# Altium PCB Beacon_V2.PcbDoc
Units mm, origin at the board's own origin, x right, y up, seen from the top; angles counter-clockwise.
Board outline 96.11 x 75.68 mm, 2 copper layers (Top Layer, Bottom Layer); 59 components, 45 nets, 261 pads, 47 vias.
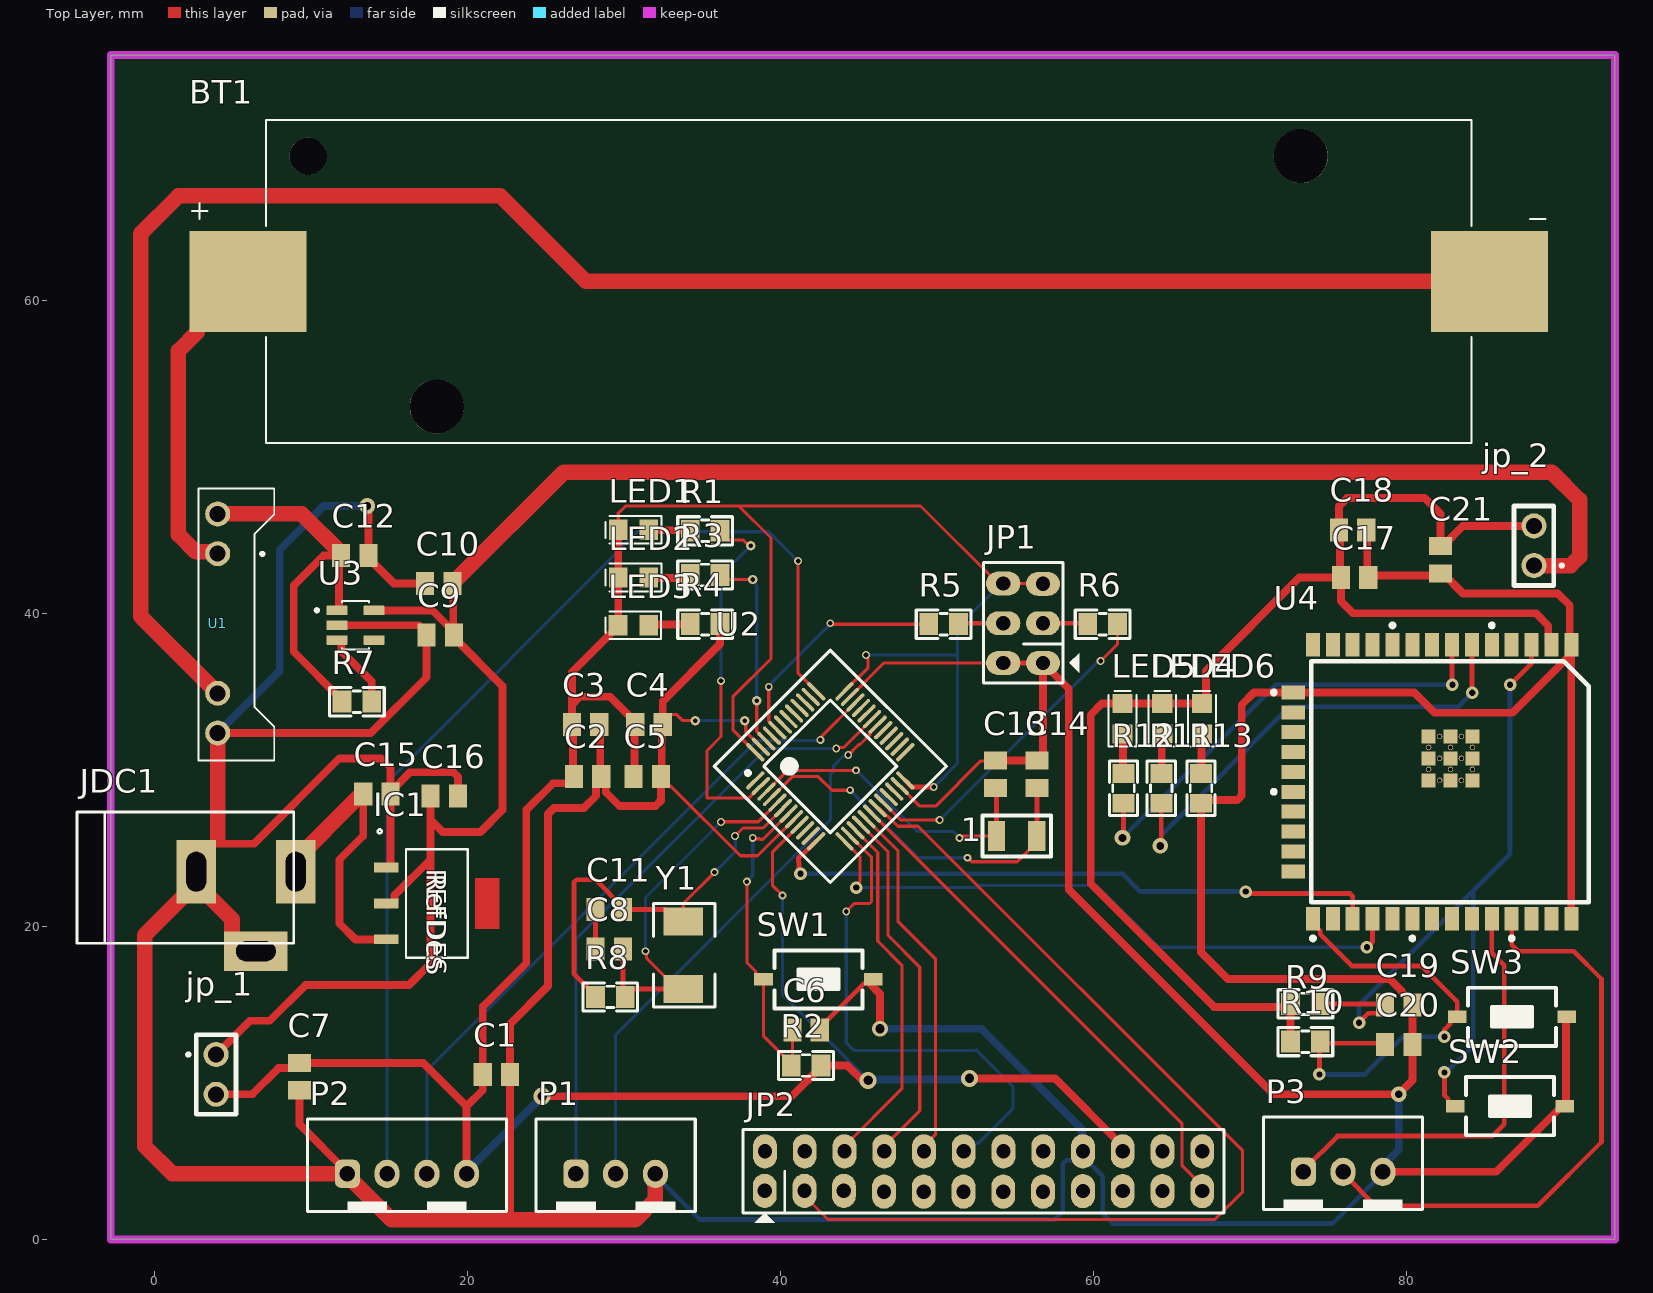
[diagram p0: Top Layer view]
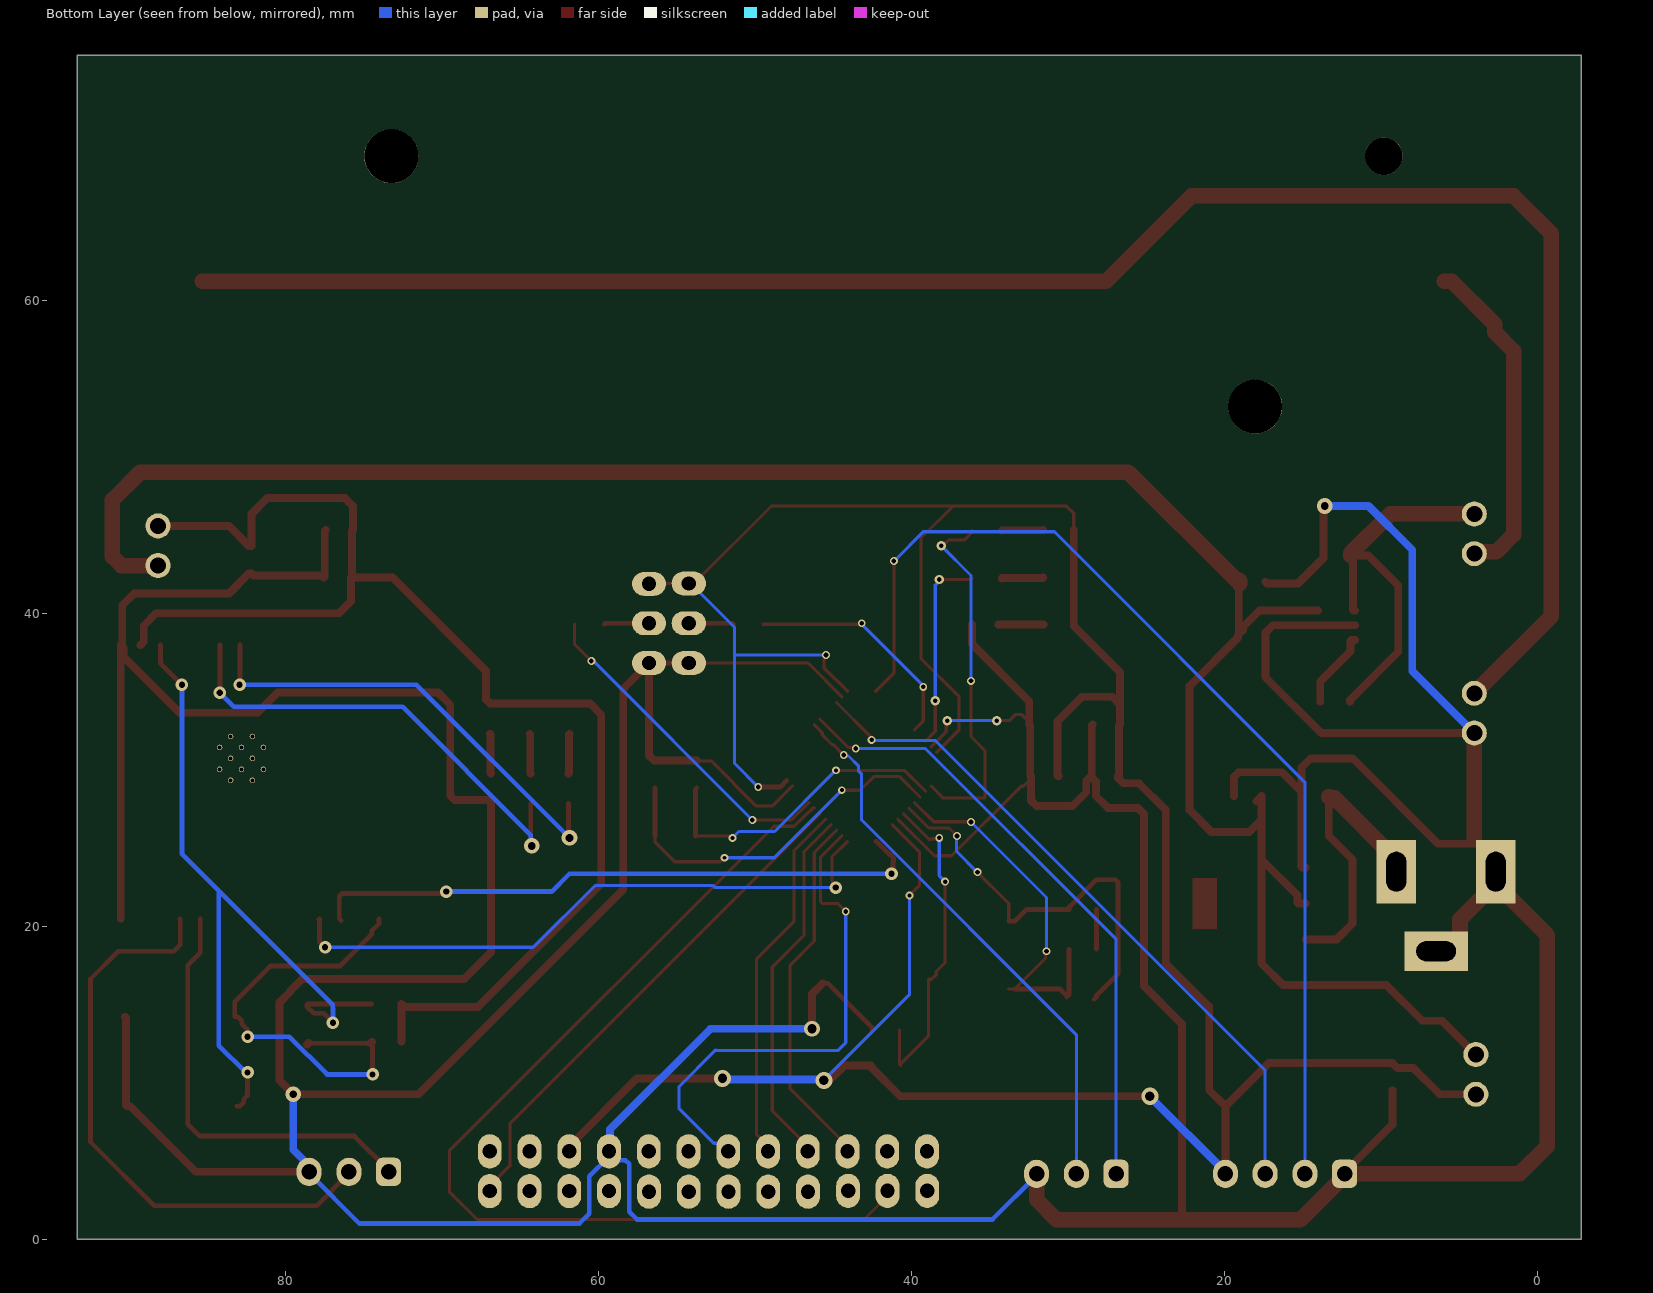
[diagram p1: Bottom Layer view, seen from below]

## Layer stack, top to bottom
Top Solder: solder mask 0.0102, Solder Resist, Dk 3.5
Top Layer: signal copper 0.0356
Dielectric 1: dielectric 0.32, FR-4, Dk 4.8
Bottom Layer: signal copper 0.0356
Bottom Solder: solder mask 0.0102, Solder Resist, Dk 3.5

## Board outline
-2.794,0 -2.794,75.677 93.317,75.677 93.317,0

## Design rules (kind name [scope] priority, off if disabled: settings)
Clearance [All] p1: gap=0.2 ignorepadtopadclearanceinfootprint=FALSE
PolygonConnect [All] p1: connectstyle=Relief reliefconductorwidth=0.254 reliefentries=4 polygonreliefangle="90 Angle" airgapwidth=0.254
RoutingVias [All] p1: holewidth=0.711 width=1.27 viastyle="Through Hole" minholewidth=0.711 minwidth=1.27 maxholewidth=0.711 maxwidth=1.27
SolderMaskExpansion [All] p1: expansion=0.102 istentingtop=FALSE
Width POWER [InNetClass('POWER')] p1: maxlimit=1 minlimit=0.2 preferedwidth=0.5 minimp=50.000000 maximp=50.000000 favimp=50.000000
Width RON [InNetClass('POWER')] p2: maxlimit=0.5 minlimit=0.2 preferedwidth=0.3
30 further rules are at their usual default settings.

## Classes and differential pairs
net class RON: BOOT0 BOOT1 BOOT_ESP DB_RX DB_TX DC_IN DW_IRQ DW_NSS DW_RESET EN_ESP LED_ESP_34 LED_ESP_35 MISO MOSI NetC8_1 NetJP1_2 NetJP1_5 NetLED1_2 NetLED2_2 NetLED3_2 NetLED4_2 NetLED5_2 NetLED6_2 NetR7_2 OSCIN OSCOUT PB9 PC13 PC14 PC15 RESET RX0_ESP SCK STMRX_ESPTX STMTX-ESPRX SWCLK SWIO TX0_ESP
net class POWER: 3V3 3V3_ESP GND O_3V3 VBAT+ VBAT- VOUT
component class Beacon_V2: 1 BT1 C1 C2 C3 C4 C5 C6 C7 C8 C9 C10 C11 C12 C13 C14 C15 C16 C17 C18 C19 C20 C21 IC1 JDC1 JP1 jp_1 jp_2 LED2 LED5 LED6 P1 P2 P3 R2 R7 R9 R12 R13 SW1 SW2 SW3 U1 U2 U3 U4 Y1

## Components (designator, comment, footprint, x,y, rotation, side; value= is the part's Value field where it differs from the comment)
1 "ABS07" ABS07 55.085,25.781 r180 top
BT1 "1042P" BAT_1042P 45.634,61.213 r180 top
C1 "10uF" Capacitor_0805 21.844,10.541 r0 top
C2 "0.1uF" Capacitor_0805 27.672,29.591 r0 top
C3 "0.1uF" Capacitor_0805 27.545,32.893 r0 top
C4 "0.1uF" Capacitor_0805 31.595,32.893 r0 top
C5 "0.1uF" Capacitor_0805 31.482,29.591 r0 top
C6 "0.1uF" Capacitor_0805 41.628,13.376 r0 top
C7 "0.1uF" Capacitor_0805 9.271,10.4 r270 top
C8 "20pF" Capacitor_0805 29.055,18.542 r0 top
C9 "47uF" Capacitor_0805 18.26,38.608 r180 top
C10 "0.1uF" Capacitor_0805 18.161,41.91 r180 top
C11 "20pF" Capacitor_0805 29.055,21.082 r0 top
C12 "0.1uF" Capacitor_0805 12.799,43.688 r0 top
C13 "20pF" Capacitor_0805 53.721,29.718 r270 top
C14 "20pF" Capacitor_0805 56.388,29.718 r270 top
C15 "10uF" Capacitor_0805 14.21,28.448 r0 top
C16 "10uF" Capacitor_0805 18.514,28.321 r0 top
C17 "0.1uF" Capacitor_0805 76.68,42.291 r0 top
C18 "10uF" Capacitor_0805 76.553,45.339 r0 top
C19 "10uF" Capacitor_0805 79.502,14.986 r0 top
C20 "10uF" Capacitor_0805 79.502,12.446 r0 top
C21 "0.1uF" Capacitor_0805 82.169,43.434 r270 top
IC1 "NCP1117ST33T3G" SOT223-3_ONS 18.034,21.463 r270 top
JDC1 "Jac DC" DC-IN 5.842,20.955 r0 top
JP1 "Connector 3x2" JP3x2 55.499,39.37 r90 top
JP2 "Connector 12x2" JP12X2_1 39.002,3.086 r0 top
jp_1 "SW_POWER" JP_1x2 3.937,10.541 r270 top
jp_2 "SW_ESP" JP_1x2 88.138,44.323 r90 top
LED1 "Led" "Led 0805 Blue" 30.607,45.339 r0 top
LED2 "Led" "Led 0805 Blue" 30.607,42.291 r0 top
LED3 "Led" "Led 0805 Blue" 30.597,39.243 r0 top
LED4 "Led" "Led 0805 Blue" 64.389,33.274 r270 top
LED5 "Led" "Led 0805 Blue" 61.849,33.274 r270 top
LED6 "Led" "Led 0805 Blue" 66.929,33.274 r270 top
P1 "UART" HDR/Header/3/BOX 29.464,4.191 r90 top
P2 "SWD" HDR/Header/4/BOX 16.129,4.191 r0 top
P3 "UART" HDR/Header/3/BOX 75.946,4.318 r90 top
R1 "1k" "tro smd 0805" 35.179,45.339 r0 top
R2 "10k" "tro smd 0805" 41.628,11.176 r0 top
R3 "1k" "tro smd 0805" 35.179,42.512 r0 top
R4 "1k" "tro smd 0805" 35.179,39.37 r0 top
R5 "10k" "tro smd 0805" 50.419,39.37 r0 top
R6 "10k" "tro smd 0805" 60.579,39.37 r0 top
R7 "1k" "tro smd 0805" 12.926,34.417 r0 top
R8 "1M" "tro smd 0805" 29.117,15.555 r0 top
R9 "10k" "tro smd 0805" 73.533,14.986 r180 top
R10 "10k" "tro smd 0805" 73.533,12.573 r180 top
R11 "1k" "tro smd 0805" 64.389,28.829 r270 top
R12 "1k" "tro smd 0805" 61.976,28.829 r270 top
R13 "1k" "tro smd 0805" 66.929,28.829 r270 top
SW1 "SW" SW1-SMD 42.418,16.62 r180 top value="SW chip 2 pin"
SW2 "SW" SW1-SMD 86.614,8.509 r180 top value="SW chip 2 pin"
SW3 "SW" SW1-SMD 86.741,14.224 r180 top value="SW chip 2 pin"
U1 "TP4056_charger" TP4056_charger -7.464,39.355 r0 top
U2 "STM32F103C8T6" LQFP48 43.18,30.226 r315 top
U3 "AP2112K-3.3TRG1" SOT95P285X140-5N 12.841,39.243 r0 top
U4 "ESP32_WROOM_32U" ESP32_WROOM_32U 81.647,29.234 r270 top
Y1 "8Mhz" "Thach Anh 2 chan SMD5032" 33.782,18.161 r270 top value=4Mhz

## Footprints (in the part's own frame and the unit in brackets; to place one, negate y for a bottom-side part, rotate by r counter-clockwise, add the part's x,y. Pads: shape width x height; smd on the part's side, far side on the other; paste and mask are expansions set on the pad)
ABS07 [mm] "HC-49US XTAL"
  rect 1.1x1.9 smd: 1(-1.29,0) 2(1.29,0)
  silkscreen extent -2.19,-1.3 2.18,1.31, body extent -1.6,-0.75 1.6,0.75, height 0.9
BAT_1042P [mm]
  rect 7.46x6.47 smd: N(-39.67,0) P(39.67,0)
  round 3.45 hole 3.45 unplated: ""(-27.6,-8) ""(27.6,8)
  round 2.39 hole 2.39 unplated: ""(35.82,-8)
  silkscreen extent -43.25,-10.32 43.25,10.32, body extent -43,-9.94 43,10.71, height 14.86
Capacitor_0805 [mm]
  rect 1.16x1.47 smd: 1(-0.875,0) 2(0.875,0)
  body extent -1,-0.6 1,0.6, height 1.2
DC-IN [mil] "Jac DC input"
  rect 100x160 hole 50 slot 100 at 90 deg: 1(125,100) 2(-125,100)
  rect 160x100 hole 50 slot 100 at 0 deg: 3(25,-100)
  silkscreen extent -425,-80 120,250, body extent -410,-105 134,269, height 434
ESP32_WROOM_32U [mm]
  rect 1.5x0.9 smd: 1(-8.75,8.88) 2(-8.75,7.61) 3(-8.75,6.34) 4(-8.75,5.07) 5(-8.75,3.8) 6(-8.75,2.53) 7(-8.75,1.26) 8(-8.75,-0.01) 9(-8.75,-1.28) 10(-8.75,-2.55) 11(-8.75,-3.82) 12(-8.75,-5.09) 13(-8.75,-6.36) 14(-8.75,-7.63) 25(8.75,-7.63) 26(8.75,-6.36) 27(8.75,-5.09) 28(8.75,-3.82) 29(8.75,-2.55) 30(8.75,-1.28) 31(8.75,-0.01) 32(8.75,1.26) 33(8.75,2.53) 34(8.75,3.8) 35(8.75,5.07) 36(8.75,6.34) 37(8.75,7.61) 38(8.75,8.88)
  rect 0.9x1.5 smd: 15(-5.715,-8.88) 16(-4.445,-8.88) 17(-3.175,-8.88) 18(-1.905,-8.88) 19(-0.635,-8.88) 20(0.635,-8.88) 21(1.905,-8.88) 22(3.175,-8.88) 23(4.445,-8.88) 24(5.715,-8.88)
  rect 0.9x0.9 smd: 39_1(-2.9,2.56) 39_2(-1.5,2.56) 39_3(-0.1,2.56) 39_4(-2.9,1.16) 39_5(-1.5,1.16) 39_6(-0.1,1.16) 39_7(-2.9,-0.24) 39_8(-1.5,-0.24) 39_9(-0.1,-0.24)
  round 0.35 hole 0.25 mask+0: 40_1(-2.2,2.56) 40_2(-0.8,2.56) 40_3(-2.9,1.86) 40_4(-1.5,1.86) 40_5(-0.1,1.86) 40_6(-2.2,1.16) 40_7(-0.8,1.16) 40_8(-2.9,0.46) 40_9(-1.5,0.46) 40_10(-0.1,0.46) 40_11(-2.2,-0.24) 40_12(-0.8,-0.24)
  silkscreen extent -10.1,-10.23 10.1,10, body extent -9,-9.13 9,10.07, height 3.35
HDR/Header/3/BOX [mm]
  rrect50% 1.8x1.6 hole 1: 1(0,2.54)
  oval 1.8x1.6 hole 1: 2(0,0) 3(0,-2.54)
  silkscreen extent -2.41,-5.08 3.5,5.08, body extent -2.29,-5 3.41,5, height 7
HDR/Header/4/BOX [mm]
  rrect50% 1.6x1.8 hole 1: 1(-3.81,0)
  oval 1.6x1.8 hole 1: 2(-1.27,0) 3(1.27,0) 4(3.81,0)
  silkscreen extent -6.35,-2.41 6.35,3.5, body extent -6.25,-2.3 6.25,3.4, height 7
JP3x2 [mil] "Connector 3x2"
  oval 60x86 hole 36: 1(-100,-50) 2(0,-50) 3(99,-50) 4(-100,50) 5(0,50) 6(100,50)
  silkscreen extent -150,-141 153,100, body extent -150,-100 150,100, height 335
JP12X2_1 [mil]
  oval 60x86 hole 36: 1(-0.5,0.5) 2(99.5,0.5) 3(198.5,0.5) 4(299.5,-1.5) 5(399.5,-1.5) 6(499.5,-1.5) 7(599.5,-1.5) 8(699.5,-1.5) 9(800,0) 10(900,0) 11(1000,0) 12(1100,0) 13(0,100) 14(100,100) 15(200,100) 16(300,100) 17(400,100) 18(500,100) 19(600,100) 20(700,100) 21(800,100) 22(900,100) 23(1000,100) 24(1100,100)
  silkscreen extent -55,-80 1155,155, body extent -55,-47 1155,150, height 366
JP_1x2 [mm] "CWF2 (DS1069-1x2)"
  round 1.6 hole 1.02 mask+0.1: 1(-1.27,0) 2(1.27,0)
  silkscreen extent -2.54,-1.88 2.54,1.27, body extent -3.77,-2.2 3.73,3.55, height 7
"Led 0805 Blue" [mm]
  rect 1.2x1.3 smd: 1(-0.975,0) 2(0.975,0)
  silkscreen extent -1.78,-0.89 1.78,0.89, body extent -1.01,-0.62 1.01,0.63, height 1.1
LQFP48 [mm]
  oval 0.25x1.55 smd: 1(-2.75,-4.025) 2(-2.25,-4.025) 3(-1.75,-4.025) 4(-1.25,-4.025) 5(-0.75,-4.025) 6(-0.25,-4.025) 7(0.25,-4.025) 8(0.75,-4.025) 9(1.25,-4.025) 10(1.75,-4.025) 11(2.25,-4.025) 12(2.75,-4.025) 25(2.75,4.025) 26(2.25,4.025) 27(1.75,4.025) 28(1.25,4.025) 29(0.75,4.025) 30(0.25,4.025) 31(-0.25,4.025) 32(-0.75,4.025) 33(-1.25,4.025) 34(-1.75,4.025) 35(-2.25,4.025) 36(-2.75,4.025)
  oval 1.55x0.25 smd: 13(4.025,-2.75) 14(4.025,-2.25) 15(4.025,-1.75) 16(4.025,-1.25) 17(4.025,-0.75) 18(4.025,-0.25) 19(4.025,0.25) 20(4.025,0.75) 21(4.025,1.25) 22(4.025,1.75) 23(4.025,2.25) 24(4.025,2.75) 37(-4.025,2.75) 38(-4.025,2.25) 39(-4.025,1.75) 40(-4.025,1.25) 41(-4.025,0.75) 42(-4.025,0.25) 43(-4.025,-0.25) 44(-4.025,-0.75) 45(-4.025,-1.25) 46(-4.025,-1.75) 47(-4.025,-2.25) 48(-4.025,-2.75)
  silkscreen extent -5.25,-5.25 5.25,5.25, body extent -4.5,-4.5 4.5,4.5, height 1.5
SOT95P285X140-5N [mm]
  rrect15% 1.35x0.6 smd: 1(-1.185,0.95) 2(-1.185,0) 3(-1.185,-0.95) 4(1.185,-0.95) 5(1.185,0.95)
  silkscreen extent -2.57,-1.55 0.85,1.55, body extent -1.5,-1.4 1.5,1.4, height 1.4
SOT223-3_ONS [mil]
  rect 24x61 smd paste+0 mask+0: 1(-90.5,-127) 2(0,-127) 3(90.5,-127)
  Top Layer region: 64,96.5 64,157.5 -64,157.5 -64,96.5
  silkscreen extent -186,-148 137,78, body extent -131,-144 131,144, height 68
SW1-SMD [mm]
  rect 1.2x0.8 smd: 1(-3.5,0) 2(3.5,0)
  silkscreen extent -2.82,-1.85 2.82,1.85, body extent -3.05,-1.85 3.05,1.85, height 2.5
"Thach Anh 2 chan SMD5032" [mil]
  rect 70x100 smd: 1(-85,0) 2(85,0)
  silkscreen extent -130,-75 130,80, body extent -98,-63 98,63, height 51
TP4056_charger [mm]
  round 1.6 hole 1.02 mask+0.1: 1(11.5,4.46) 2(11.5,-4.46) 3(11.5,7) 4(11.5,-7)
  silkscreen extent 10.29,-8.76 15.11,8.64, body extent -14.19,-8.76 15.11,8.64, height 9.34
"tro smd 0805" [mm]
  rect 1.2x1.4 smd: 1(-0.946,-0.061) 2(0.954,-0.061)
  silkscreen extent -1.75,-0.97 1.75,0.84, body extent -1.56,-0.76 1.44,0.64, height 0.53

## Part data
1: "SMD Quartz Crystal", Created by="Zion Blue", Published="28 April 2014", Publisher="Cynetik Group"
BT1: "SMT Polarized Battery Holder for 18650 Battery", Package=None, Check_prices=https://www.snapeda.com/parts/1042P/Keystone/view-part/?ref=eda, MF="Keystone Electronics", MP=1042P, SnapEDA_Link=https://www.snapeda.com/parts/1042P/Keystone/view-part/?ref=snap
C1 C2 C3 C4 C5 C6 C7 C8 C9 C10 C11 C12 C13 C14 C15 C16 C17 C18 C19 C20 C21: library part Capacitor_0805, "Capacitor; Ceramic; Cap; .220uF; Tol 10%; SMT; Vol-Rtg 50V; X7R; Tape And Reel"
IC1: "SOT223"
JDC1: library part DCIN, "Jac DC input"
JP1: library part JP3x2
JP2: library part JP12x2
jp_1 jp_2: library part JP_1x2
LED1 LED2 LED3 LED4 LED5 LED6: "Typical LED"
P1 P3: library part "Header 3", "Header, 3-Pin"
P2: library part "Header 4_1", "Header, 4-Pin"
R1 R3 R4 R7 R11 R12 R13: library part "Tro 0805 1% 1k", "Dán", Chung_Loai=Dán, Don_Vi=Con, Ma_Hang=MH005468, So_Chan=2, Ten_Linh_Kien="Trở 0805 1% 1k"
R2 R5 R6 R9 R10: library part "Tro 0805 1% 10k", "Dán", Chung_Loai=Dán, Don_Vi=Con, Ma_Hang=MH005473, So_Chan=2, Ten_Linh_Kien="Trở 0805 1% 10k"
R8: library part "Tro 0805 1% 1M", "Dán", Chung_Loai=Dán, Don_Vi=Con, Ma_Hang=MH005469, So_Chan=2, Ten_Linh_Kien="Trở 0805 1% 1M"
SW1 SW2 SW3: library part SW2, "Switch button 2 pin"
U2: "STM32 ARM-based 32-bit MCU with ARM 32-bit Cortex-M3 Microcontroller, 128 Kbytes Flash, 48-pin LQFP, Industrial Temperature", ComponentLink1Description="Manufacturer Link", ComponentLink1URL=www.st.com/stm32, ComponentLink2Description=Datasheet, ComponentLink2URL=http://www.st.com/stonline/products/literature/ds/13586.pdf, DatasheetVersion="rev6, Mar-2008", PackageDescription="48-Pin Low-Profile Quad Flat Pack, 7 x 7 mm Body, 0.5 mm Pitch (LQFP48)", PackageReference=LQFP48, PackageVersion=Mar-2008, Published=30-May-2008, Publisher="Altium Limited"
U3: "Linear Voltage Regulator IC Positive Fixed 1 Output 600mA SOT-25", Package="SOT-753 Diodes Inc.", Availability="In Stock", Check_prices=https://www.snapeda.com/parts/AP2112K-3.3TRG1/Diodes+Inc./view-part/?ref=eda, MF="Diodes Inc.", MP=AP2112K-3.3TRG1, Price=None, Purchase-URL=https://pricing.snapeda.com/search/part/AP2112K-3.3TRG1/?ref=eda, SnapEDA_Link=https://www.snapeda.com/parts/AP2112K-3.3TRG1/Diodes+Inc./view-part/?ref=snap
U4: "Bluetooth, WiFi 802.11b/g/n, Bluetooth v4.2 +EDR, Class 1, 2 and 3 Transceiver Module 2.4GHz ~ 2.5GHz Antenna Not Included, U.FL Surface Mount"
Y1: library part "Thach Anh 2 chan SMD 5032", "Crystal For all Crystal 2pin."

## Via types
v1: diameter 0.5, hole 0.3, Top Layer to Bottom Layer, 18 vias
v2: diameter 0.8, hole 0.4, Top Layer to Bottom Layer, 11 vias
v3: diameter 0.5, hole 0.25, Top Layer to Bottom Layer, 5 vias
v4: diameter 0.6, hole 0.3, Top Layer to Bottom Layer, 5 vias
v5: diameter 1, hole 0.5, Top Layer to Bottom Layer, 4 vias
v6: diameter 1.1, hole 0.6, Top Layer to Bottom Layer, 3 vias
v7: diameter 1, hole 0.6, Top Layer to Bottom Layer, 1 vias

## Nets (pads, with @x,y where several pads share a name; then routed paths per layer and width w, separated by ;. In a path a pad name is that pad's centre, name@x,y a point inside that pad or via, vN(x,y) a via of type N, cw(c..) or ccw(c..) an arc to the next point about the centre after c; other vN are vias at no path point)
3V3: C1.1 C2.1 C3.1 C4.1 C5.1 C7.1 JP1.3 JP1.6 JP2.22 jp_1.2 LED1.1 LED2.1 LED3.1 P2.4 R2.2 U2.9 U2.24 U2.36 U2.48 | length 213.3
  Top Layer w0.2: LED1.1 29.632,46.396 30.099,46.863 37.338,46.863 ; U2.48 36.957,32.56 36.957,34.671 39.386,37.1 39.386,44.815 37.338,46.863 ; v3(40.132,21.971) 39.497,22.606 39.497,24.775 U2.9 ; U2.36 45.593,36.528 v1@45.593,37.169 ; JP1.3 56.756,41.897 54.242,41.897 JP1.6 53.899,41.91 48.946,46.863 37.338,46.863
  Top Layer w0.3: U2.24 48.395,28.9 v1(49.784,28.9)
  Top Layer w0.5: jp_1.2 6.249,9.271 7.923,10.945 8.941,10.945 C7.1 17.173,11.275 19.939,8.509 ; P2.4 19.939,8.509 ; v6(24.765,9.144) 40.711,9.144 42.582,11.015 R2.2 44.257,11.115 v6@45.339,10.033 ; LED1.1 LED2.1 29.627,42.286 29.627,39.248 LED3.1 29.622,39.193 26.67,36.241 26.67,34.163 ; C5.1 30.663,29.647 30.663,33.104 29.097,34.671 27.178,34.671 26.67,34.163 ; v6(52.07,10.287) 57.531,10.287 61.862,5.956 JP2.22 ; 19.939,8.509 20.969,9.539 C1.1 20.969,14.873 23.749,17.653 23.749,27.432 25.467,29.15 26.467,29.15 26.797,29.48 C2.1 26.734,29.654 26.734,32.829 C3.1 26.67,34.163
  Bottom Layer w0.2: v3(40.132,21.971) 40.132,15.621 v6(45.593,10.16) ; v1(45.466,37.338) 51.308,37.338 ; v1(49.784,28.9) 51.308,30.424 51.308,37.338 ; JP1.6 54.102,41.91 51.308,39.116 51.308,37.338
  Bottom Layer w0.5: P2.4 19.939,4.305 24.765,9.131 v6(24.765,9.144) ; v6(45.593,10.16) 45.657,10.223 52.007,10.223 v6(52.07,10.287)
3V3_ESP: C17.1 C18.1 C21.1 jp_2.2 LED4.1 LED5.1 LED6.1 R9.2 R10.2 U4.2 | length 87
  Top Layer w0.5: R10.2 R9.2 72.391,14.859 67.691,14.859 59.817,22.733 59.817,33.528 60.538,34.249 LED5.1 LED4.1 LED6.1 67.183,34.503 67.183,36.322 73.152,42.291 C17.1 75.805,40.781 76.581,40.005 88.265,40.005 89.057,39.213 89.057,38.184 U4.2 ; C17.1@75.741,42.355 75.741,45.276 C18.1 75.678,46.849 76.2,47.371 81.153,47.371 82.169,46.355 C21.1 82.324,44.309 83.608,45.593 jp_2.2 jp_2.2@88.082,45.649
BOOT0: R5.1 U2.44 | length 15
  Top Layer w0.2: v1(39.243,35.306) 39.243,33.116 39.804,32.555 U2.44 ; v1(43.18,39.37) 43.241,39.309 R5.1
  Bottom Layer w0.2: v1(39.243,35.306) 39.243,35.369 43.18,39.306 v1(43.18,39.37)
BOOT1: R6.2 U2.20 | length 21.4
  Top Layer w0.2: U2.20 47.67,26.797 v1(50.165,26.797) ; v1(60.452,36.957) 61.533,38.038 R6.2
  Bottom Layer w0.2: v1(50.165,26.797) 60.268,36.9 60.395,36.9 v1(60.452,36.957)
BOOT_ESP: C20.1 R10.1 SW3.2 U4.25 | length 29.7
  Top Layer w0.3: U4.25 74.017,20.184 74.487,19.714 74.487,19.493 76.517,17.462 80.962,17.462 83.241,15.184 SW3.2 83.041,14.224 82.791,13.974 82.791,13.774 82.423,13.406 v2(82.423,12.954) ; v2(74.434,10.541) 74.434,12.589 R10.1 ; R10.1@74.572,12.54 C20.1@78.533,12.54
  Top Layer w0.5: R10.1 R10.1@74.572,12.54 ; C20.1@78.533,12.54 C20.1
  Bottom Layer w0.3: v2(74.434,10.541) 77.343,10.541 79.756,12.954 v2(82.423,12.954)
DB_RX: P1.1 U2.31 | length 39.7
  Top Layer w0.2: v1(43.561,31.369) 43.618,31.426 44.027,31.426 U2.31
  Bottom Layer w0.2: P1.1 26.924,19.177 39.116,31.369 v1(43.561,31.369)
DB_TX: P1.2 U2.30 | length 35.8
  Top Layer w0.2: v1(44.323,30.945) 44.996,31.618 45.08,31.618 45.696,32.234 45.696,32.375 46.203,32.882 U2.30
  Bottom Layer w0.2: P1.2 29.464,13.081 43.18,26.797 43.18,29.718 43.373,29.911 43.373,30.238 44.022,30.888 44.266,30.888 v1(44.323,30.945)
DC_IN: C15.1 IC1.3 JDC1.1 | length 19.1
  Top Layer w0.5: C15.1 13.335,28.293 13.335,25.781 11.811,24.257 11.811,20.193 12.84,19.164 IC1.3
  Top Layer w1: JDC1.1 9.017,24.257 12.973,28.213 13.255,28.213 C15.1@13.335,28.293
DW_IRQ: JP2.2 U2.19 | length 64.7
  Top Layer w0.2: JP2.2 41.529,2.769 43.028,1.27 67.748,1.27 69.524,3.047 69.524,5.66 48.787,26.397 47.504,26.397 46.84,27.026 46.309,27.557 U2.19
DW_NSS: JP2.18 U2.14 | length 32.6
  Top Layer w0.2: v1(44.196,20.955) 44.704,21.463 45.692,21.463 45.809,21.58 45.809,24.415 U2.14
  Bottom Layer w0.2: v1(44.196,20.955) 44.196,12.573 44.704,12.065 52.451,12.065 52.495,12.109 54.864,9.74 54.864,8.382 52.621,6.139 52.215,6.139 JP2.18
DW_RESET: JP2.12 U2.18 | length 32.9
  Top Layer w0.2: U2.18 65.659,7.393 65.659,4.699 66.942,3.416 JP2.12
EN_ESP: C19.1 R9.1 SW2.2 U4.3 | length 50.1
  Top Layer w0.3: R9.1 78.566,15.047 C19.1 78.627,14.874 78.197,14.444 77.563,14.444 v2(76.962,13.843) ; v2(82.423,10.668) 82.423,9.2 82.664,8.959 82.664,8.759 82.914,8.509 SW2.2 ; v2(86.614,35.433) 87.987,36.806 U4.3
  Bottom Layer w0.3: v2(76.962,13.843) 76.962,14.777 76.982,14.757 76.982,15.006 84.264,22.288 ; v2(82.423,10.668) 82.55,10.668 84.264,12.383 84.264,22.288 ; v2(86.614,35.433) 86.614,24.638 84.264,22.288
GND: C1.2 C2.2 C3.2 C4.2 C5.2 C6.2 C7.2 C9.2 C10.2 C12.2 C13.1 C14.1 C15.2 C16.2 C17.2 C18.2 C19.2 C20.2 C21.2 IC1.1 JDC1.2 JDC1.3 JP1.1 JP1.4 JP2.21 P1.3 P2.1 P3.3 R4.2 R13.2 SW1.1 SW2.1 SW3.1 U1.4 U2.8 U2.23 U2.35 U2.47 U3.2 U4.1 U4.15 U4.38 | length 505.7
  Top Layer w0.2: C5.2 32.357,29.436 32.837,28.956 32.992,28.956 37.437,24.511 38.526,24.511 U2.8 ; C4.2@32.47,33.048 32.95,33.528 33.373,33.528 33.754,33.147 v4@34.417,33.147 ; v4(37.719,33.147) 37.777,33.089 37.777,32.447 U2.47 ; U2.35 44.442,34.663 44.45,34.671 44.45,34.678 46.602,36.83 JP1.4 ; U2.23 48.902,27.686 49.911,27.686 52.803,30.578 53.706,30.578 C13.1
  Top Layer w0.3: C6.2 42.503,13.531 45.341,16.37 SW1.1@45.668,16.37 ; JP1.4 JP1.1
  Top Layer w0.5: JDC1.2 2.667,24.257 3.687,25.277 6.354,25.277 11.811,30.734 14.478,30.734 15.085,30.127 C15.2@15.085,28.603 ; U1.4 13.816,32.355 17.385,35.924 C9.2 17.378,38.615 17.378,38.77 16.905,39.243 U3.2 ; C7.2 9.271,7.339 12.319,4.291 P2.1 ; v5(13.589,46.863) 13.674,46.778 C12.2 13.674,43.533 15.297,41.91 C10.2 C10.2@17.399,42.023 ; IC1.1 15.03,23.762 15.085,23.817 C15.2 C15.2@15.085,28.603 ; C16.2 19.389,29.552 19.096,29.845 16.327,29.845 C15.2@15.085,28.603 ; 22.733,1.26 22.719,1.274 C1.2 22.719,13.761 25.146,16.188 25.146,27.178 25.527,27.559 27.432,27.559 28.217,28.344 28.217,29.261 C2.2 ; C3.2 28.483,32.829 28.483,29.654 C2.2 ; C5.2@32.357,29.436 32.357,28.039 32.004,27.686 29.718,27.686 28.829,28.575 28.829,29.309 C2.2 ; C5.2 32.413,29.647 32.413,32.837 C4.2 32.47,33.048 32.47,34.375 36.133,38.038 R4.2 ; SW1.1@45.668,16.37 46.355,15.683 v7(46.355,13.462) ; C13.1 C14.1 56.439,30.593 56.769,30.923 JP1.1 56.822,36.83 57.295,36.357 57.295,36.304 58.42,35.179 58.42,22.352 71.501,9.271 v5(79.502,9.271) 79.502,9.289 80.377,10.164 C20.2 C19.2 80.377,15.141 79.693,15.825 79.693,15.871 78.927,16.637 68.58,16.637 66.868,18.349 R13.2 67.061,28.067 69.176,28.067 69.469,28.36 69.469,34.163 70.255,34.949 U4.15 80.494,34.949 81.788,33.655 86.764,33.655 90.327,37.218 90.327,37.784 U4.1 ; C18.2 77.491,45.276 77.491,42.355 C17.2 77.689,42.425 82.035,42.425 C21.2 82.324,42.559 83.608,41.275 89.662,41.275 90.424,40.513 90.424,38.087 U4.1 ; P3.3 85.723,4.318 89.914,8.509 SW2.1 90.178,8.572 90.178,14.16 SW3.1 ; U4.38 U4.1
  Top Layer w1: JDC1.2 JDC1.2@2.667,22.733 ; 4.036,25.626 U1.4 ; JDC1.3 5.715,18.415 4.945,19.185 4.945,20.455 JDC1.2@2.667,22.733 ; P1.3 32.004,2.54 30.724,1.26 22.733,1.26 15.15,1.26 12.319,4.091 P2.1 1.143,4.191 -0.635,5.969 -0.635,19.431 JDC1.2@2.667,22.733
  Bottom Layer w0.2: v4(34.544,33.147) v4(37.719,33.147)
  Bottom Layer w0.3: P1.3 32.004,4.091 34.825,1.27 57.531,1.27 58.039,1.778 58.039,4.826 58.275,5.062 58.757,5.062 JP2.21 59.322,5.296 60.579,4.039 60.579,1.651 61.214,1.016 75.284,1.016 78.486,4.218 P3.3
  Bottom Layer w0.5: U1.4 8.001,36.32 8.001,44.069 10.795,46.863 v5(13.589,46.863) ; v7(46.355,13.462) 52.832,13.462 59.261,7.033 59.261,5.687 JP2.21 ; P3.3 78.486,4.716 79.502,5.732 v5(79.502,9.271)
LED_ESP_34: R11.2 U4.6 | length 29.7
  Top Layer w0.3: R11.2 64.328,25.461 v5@64.389,25.4 ; U4.6 84.177,35.203 v2@84.201,35.179
  Bottom Layer w0.3: v5(64.262,25.146) 64.316,25.2 64.316,25.835 72.517,34.036 83.312,34.036 v2(84.201,34.925)
LED_ESP_35: R12.2 U4.7 | length 29.9
  Top Layer w0.3: v5(61.849,25.654) 61.915,25.72 R12.2 ; U4.7 82.907,35.457 v2(82.931,35.433)
  Bottom Layer w0.3: v5(61.849,25.654) 71.628,35.433 v2(82.931,35.433)
MISO: JP2.16 U2.16 | length 23.4
  Top Layer w0.2: U2.16 46.609,25.029 46.609,25.019 46.863,24.765 46.863,19.431 48.895,17.399 48.895,8.23 46.622,5.956 JP2.16
MOSI: JP2.17 U2.17 | length 23.4
  Top Layer w0.2: U2.17 47.498,24.847 47.498,20.32 49.911,17.907 49.911,6.709 49.162,5.96 JP2.17
NetC8_1: C8.1 C11.1 | length 2.5
  Top Layer w0.3: C8.1 C11.1
NetJP1_2: JP1.2 R6.1 | length 2.9
  Top Layer w0.3: JP1.2 59.573,39.37 R6.1
NetJP1_5: JP1.5 R5.2 | length 2.9
  Top Layer w0.3: R5.2 51.434,39.37 JP1.5
NetLED1_2: LED1.2 R1.1 | length 2.7
  Top Layer w0.5: LED1.2 31.612,45.309 34.203,45.309 R1.1
NetLED2_2: LED2.2 R3.1 | length 2.7
  Top Layer w0.5: LED2.2 31.612,42.261 34.203,42.261 R3.1@34.233,42.23
NetLED3_2: LED3.2 R4.1 | length 2.9
  Top Layer w0.5: LED3.2@31.572,39.293 R4.1@34.453,39.293
NetLED4_2: LED4.2 R11.1 | length 2.5
  Top Layer w0.5: R11.1 64.359,29.805 64.359,32.269 LED4.2
NetLED5_2: LED5.2 R12.1 | length 2.6
  Top Layer w0.5: LED5.2 61.882,32.266 61.882,29.808 R12.1
NetLED6_2: LED6.2 R13.1 | length 2.5
  Top Layer w0.5: R13.1 66.899,29.805 66.899,32.269 LED6.2
NetR7_2: R7.2 U3.3 | length 5
  Top Layer w0.5: U3.3 11.901,38.293 11.951,38.243 11.951,37.579 13.88,35.65 R7.2
O_3V3: C9.1 C10.1 C16.1 IC1.2 jp_1.1 jp_2.1 U3.5 | length 141.2
  Top Layer w0.5: jp_1.1 6.096,13.97 7.366,13.97 9.652,16.256 16.256,16.256 17.639,17.639 17.639,24.294 ; U3.5 17.751,40.193 18.805,39.139 18.805,38.938 C9.1@19.085,38.657 ; IC1.2 15.278,21.463 15.333,21.518 15.333,21.988 17.639,24.294 ; C16.1@17.969,27.991 C16.1 17.639,26.811 ; C10.1 19.085,41.861 C9.1@19.085,38.657 ; 17.639,24.294 17.639,26.811 ; 17.639,26.811 18.415,26.035 20.828,26.035 22.225,27.432 22.225,35.363 19.135,38.453 C9.1 C9.1@19.085,38.657
  Top Layer w1: C10.1 19.036,42.065 19.116,42.145 19.271,42.145 26.148,49.022 89.281,49.022 91.059,47.244 91.059,43.639 90.473,43.053 jp_2.1
OSCIN: C8.2 R8.2 U2.5 Y1.2 | length 24.7
  Top Layer w0.2: v1(31.369,18.415) 31.426,18.358 31.426,17.977 33.401,16.002 Y1.2 ; v1(36.195,26.67) 36.214,26.689 38.582,26.689 U2.5
  Top Layer w0.3: C8.2 29.93,15.635 R8.2 30.071,15.552 30.521,16.002 Y1.2@33.401,16.002
  Bottom Layer w0.2: v1(31.369,18.415) 31.369,21.844 v1(36.195,26.67)
OSCOUT: C11.2 R8.1 U2.6 Y1.1 | length 27
  Top Layer w0.2: Y1.1 33.782,21.463 v1(35.785,23.466) ; v1(37.084,25.781) 37.097,25.781 37.605,26.289 38.889,26.289 U2.6
  Top Layer w0.3: R8.1@28.321,15.344 R8.1 28.171,15.594 26.797,16.968 26.797,22.811 26.973,22.987 28.18,22.987 29.93,21.237 C11.2 32.639,21.082 33.401,20.32 Y1.1
  Bottom Layer w0.2: v1(35.785,23.466) 37.125,24.806 37.125,25.74 v1(37.084,25.781)
PB9: R3.2 U2.46 | length 12.8
  Top Layer w0.2: R3.2@36.133,42.23 36.2,42.164 v4(38.227,42.164) ; v4(38.481,34.417) 38.481,32.464 39.096,31.848 U2.46
  Bottom Layer w0.2: v4(38.227,42.164) 38.227,42.056 38.481,41.802 v4(38.481,34.417)
PC13: R1.2 U2.2 | length 23.5
  Top Layer w0.2: R1.2 36.133,45.178 36.633,44.678 37.637,44.678 37.992,44.323 v4(38.1,44.323) ; v1(36.195,35.687) 36.195,32.131 35.306,31.242 35.306,28.194 37.966,28.194 U2.2
  Bottom Layer w0.2: v1(36.195,35.687) 36.195,42.418 v4(38.1,44.323)
PC14: 1.2 C13.2 U2.3 | length 20
  Top Layer w0.2: U2.3 40.451,29.972 v3(44.831,29.972) ; v3(51.435,25.654) 51.516,25.654 51.643,25.781 1.2
  Top Layer w0.3: C13.2 53.795,28.769 1.2
  Bottom Layer w0.2: v3@44.958,29.845 48.739,26.064 51.025,26.064 v3(51.435,25.654)
PC15: 1.1 C14.2 U2.4 | length 23.5
  Top Layer w0.2: U2.4 40.758,29.572 42.418,29.572 43.288,28.702 v3(44.45,28.702) ; v3(51.943,24.384) 51.956,24.384 52.21,24.13 55.124,24.13 56.375,25.381 1.1
  Top Layer w0.3: 1.1 56.388,25.794 C14.2
  Bottom Layer w0.2: v3@44.577,28.575 48.768,24.384 v3(51.943,24.384)
RESET: C6.1 R2.1 SW1.2 U2.7 | length 21.2
  Top Layer w0.2: v1(37.846,22.86) 37.846,17.692 38.418,17.12 38.418,16.92 38.718,16.62 SW1.2 38.918,12.98 R2.1@40.682,11.215 ; v1(38.227,25.654) 38.284,25.597 38.65,25.597 38.677,25.569 38.877,25.569 U2.7 ; R2.1 40.753,11.186 C6.1
  Bottom Layer w0.2: v1(37.846,22.86) 38.227,23.241 v1(38.227,25.654)
RX0_ESP: P3.1 U4.34 | length 27.6
  Top Layer w0.3: P3.1 73.406,4.418 75.592,6.604 85.471,6.604 86.233,7.366 86.233,17.526 85.447,18.312 U4.34
SCK: JP2.15 U2.15 | length 23.3
  Top Layer w0.2: JP2.15 44.082,5.956 47.752,9.627 47.752,17.526 46.209,19.069 46.209,24.722 U2.15
STMRX_ESPTX: U2.13 U4.28 | length 39.6
  Top Layer w0.2: U2.13 45.085,24.432 45.085,22.895 44.831,22.641 v2(44.831,22.479)
  Top Layer w0.3: v2@77.597,18.796 77.827,19.026 U4.28 U4.28@77.851,20.46
  Bottom Layer w0.2: v2(44.831,22.479) 52.544,22.479 52.671,22.606 60.222,22.606 64.159,18.669 v2(77.47,18.669)
STMTX-ESPRX: U2.12 U4.27 | length 40.1
  Top Layer w0.3: v2(41.275,23.368) 41.179,23.464 41.179,24.104 41.148,24.135 41.148,24.384 41.36,24.596 41.404,24.596 42.243,25.435 U2.12 ; v2(69.723,22.225) 69.85,22.098 76.381,22.098 76.557,21.922 U4.27 U4.27@76.454,20.381
  Bottom Layer w0.3: v2(41.275,23.368) 61.849,23.368 62.992,22.225 v2(69.723,22.225)
SWCLK: P2.2 U2.37 | length 67.4
  Top Layer w0.2: v1(41.123,43.349) 41.123,36.172 U2.37
  Bottom Layer w0.2: P2.2 14.859,29.21 30.861,45.212 39.243,45.212 v1@41.021,43.434
SWIO: P2.3 U2.34 | length 43.8
  Top Layer w0.2: v1(42.545,31.919) 42.602,31.976 42.602,32.123 U2.34
  Bottom Layer w0.2: P2.3 17.399,10.795 38.481,31.877 42.503,31.877 v1(42.545,31.919)
TX0_ESP: P3.2 U4.35 | length 37.9
  Top Layer w0.3: P3.2 75.946,4.218 78.005,2.159 88.392,2.159 92.456,6.223 92.456,16.637 90.678,18.415 87.122,18.415 86.717,18.82 U4.35 U4.35@86.741,20.46
VBAT+: BT1.P U1.1 | length 21.3
  Top Layer w1: U1.1 3.921,43.93 2.63,43.93 1.524,45.036 1.524,56.773 2.734,57.983 2.734,58.478 5.469,61.213 BT1.P
VBAT-: BT1.N U1.2 | length 120.9
  Top Layer w1: U1.2 -0.889,39.82 -0.889,64.262 1.524,66.675 22.098,66.675 27.56,61.213 BT1.N
VOUT: C12.1 R7.1 U1.3 U3.1 | length 25.3
  Top Layer w0.5: U3.1 11.74,40.193 11.79,40.243 11.79,43.554 C12.1 10.795,43.688 8.89,41.783 8.89,37.547 11.98,34.456 R7.1
  Top Layer w1: U1.3 9.412,46.355 11.924,43.843 C12.1
pads on no net: BT1. JP2.1 JP2.3 JP2.4 JP2.5 JP2.6 JP2.7 JP2.8 JP2.9 JP2.10 JP2.11 JP2.13 JP2.14 JP2.19 JP2.20 JP2.23 JP2.24 U2.1 U2.10 U2.11 U2.21 U2.22 U2.25 U2.26 U2.27 U2.28 U2.29 U2.32 U2.33 U2.38 U2.39 U2.40 U2.41 U2.42 U2.43 U2.45 U3.4 U4.4 U4.5 U4.8 U4.9 U4.10 U4.11 U4.12 U4.13 U4.14 U4.16 U4.17 U4.18 U4.19 U4.20 U4.21 U4.22 U4.23 U4.24 U4.26 U4.29 U4.30 U4.31 U4.32 U4.33 U4.36 U4.37 U4.39_1 U4.39_2 U4.39_3 U4.39_4 U4.39_5 U4.39_6 U4.39_7 U4.39_8 U4.39_9 U4.40_1 U4.40_2 U4.40_3 U4.40_4 U4.40_5 U4.40_6 U4.40_7 U4.40_8 U4.40_9 U4.40_10 U4.40_11 U4.40_12

## Keep-outs
Top Layer:
  the board outline again, w0.5

## Text inside footprints (layer, text, board x,y; h text height)
IC1: Top Overlay "RefDes" at 17.399,23.368 h1.27 r270; Top Overlay "REFDES" at 17.399,23.685 h1.27 r270; Mechanical 13 "RefDes2" at 17.399,23.685 h1.27 r270
U4: Mechanical 2 "1" at 89.396,35.534 h1.52 r270